# Altium PCB PCB_V2.0.PcbDoc
Units mm, origin at the board's own origin, x right, y up, seen from the top; angles counter-clockwise.
Board outline 72 x 42.16 mm, 2 copper layers (Top Layer, Bottom Layer), stack 1.57 mm thick; 19 components, 30 nets, 54 pads, 18 vias.
Unrouted connection lines stored in the file: 2.
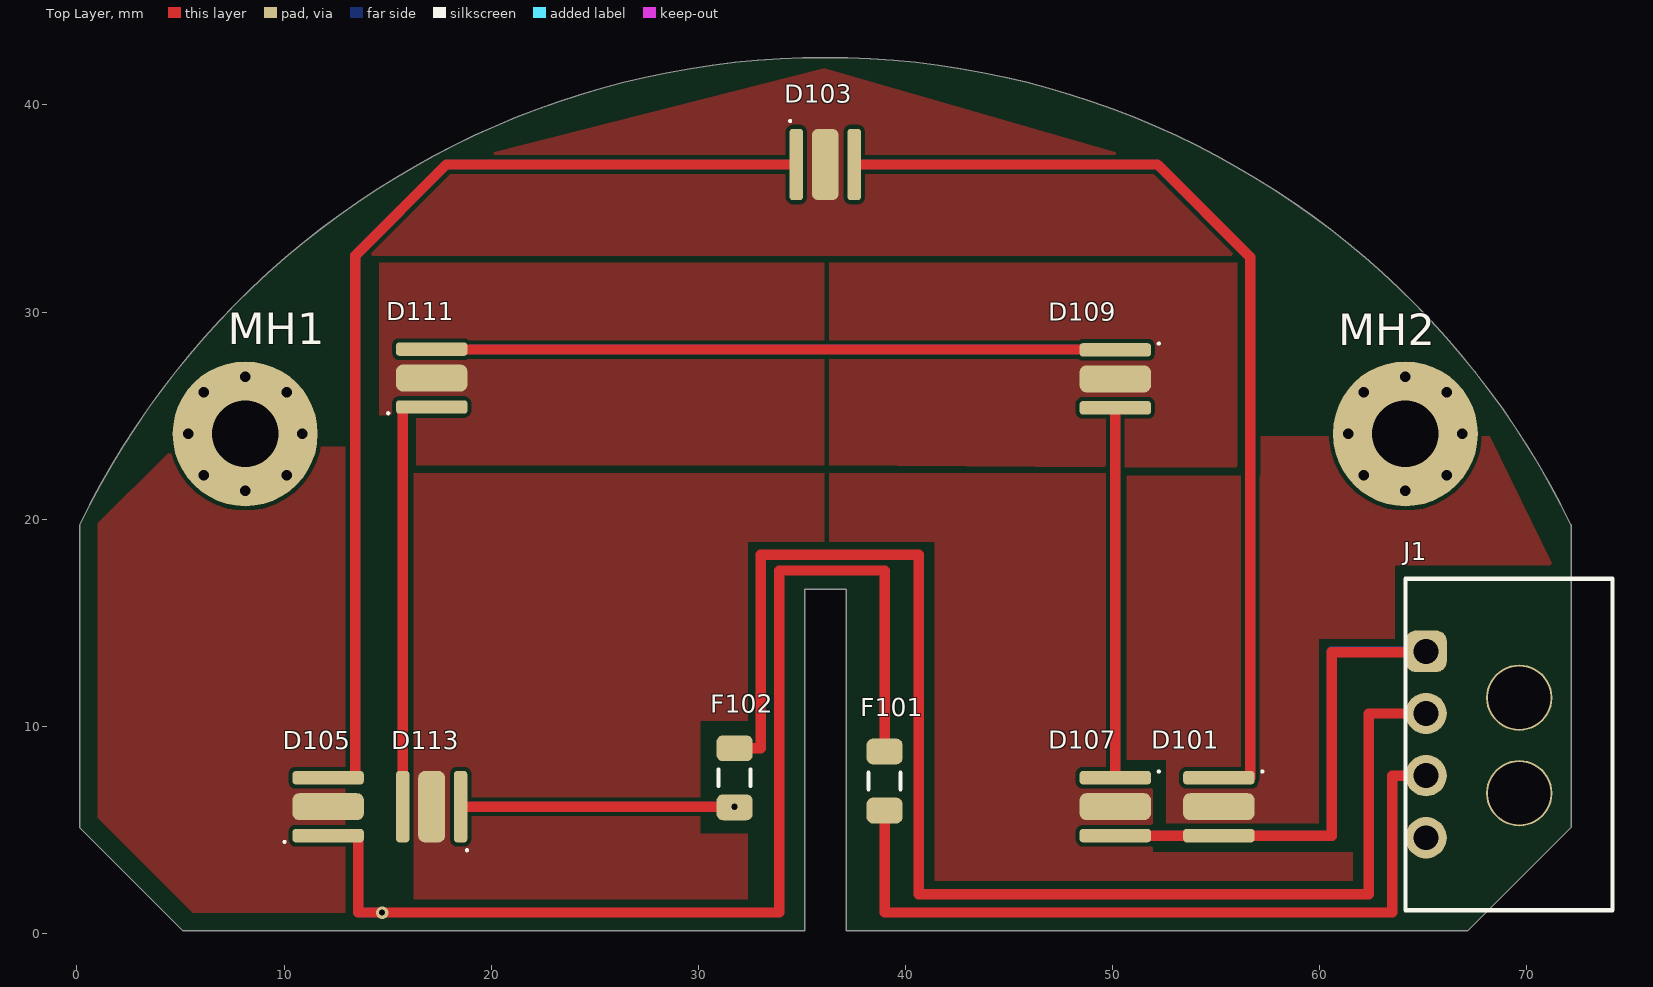
[diagram p0: Top Layer view]
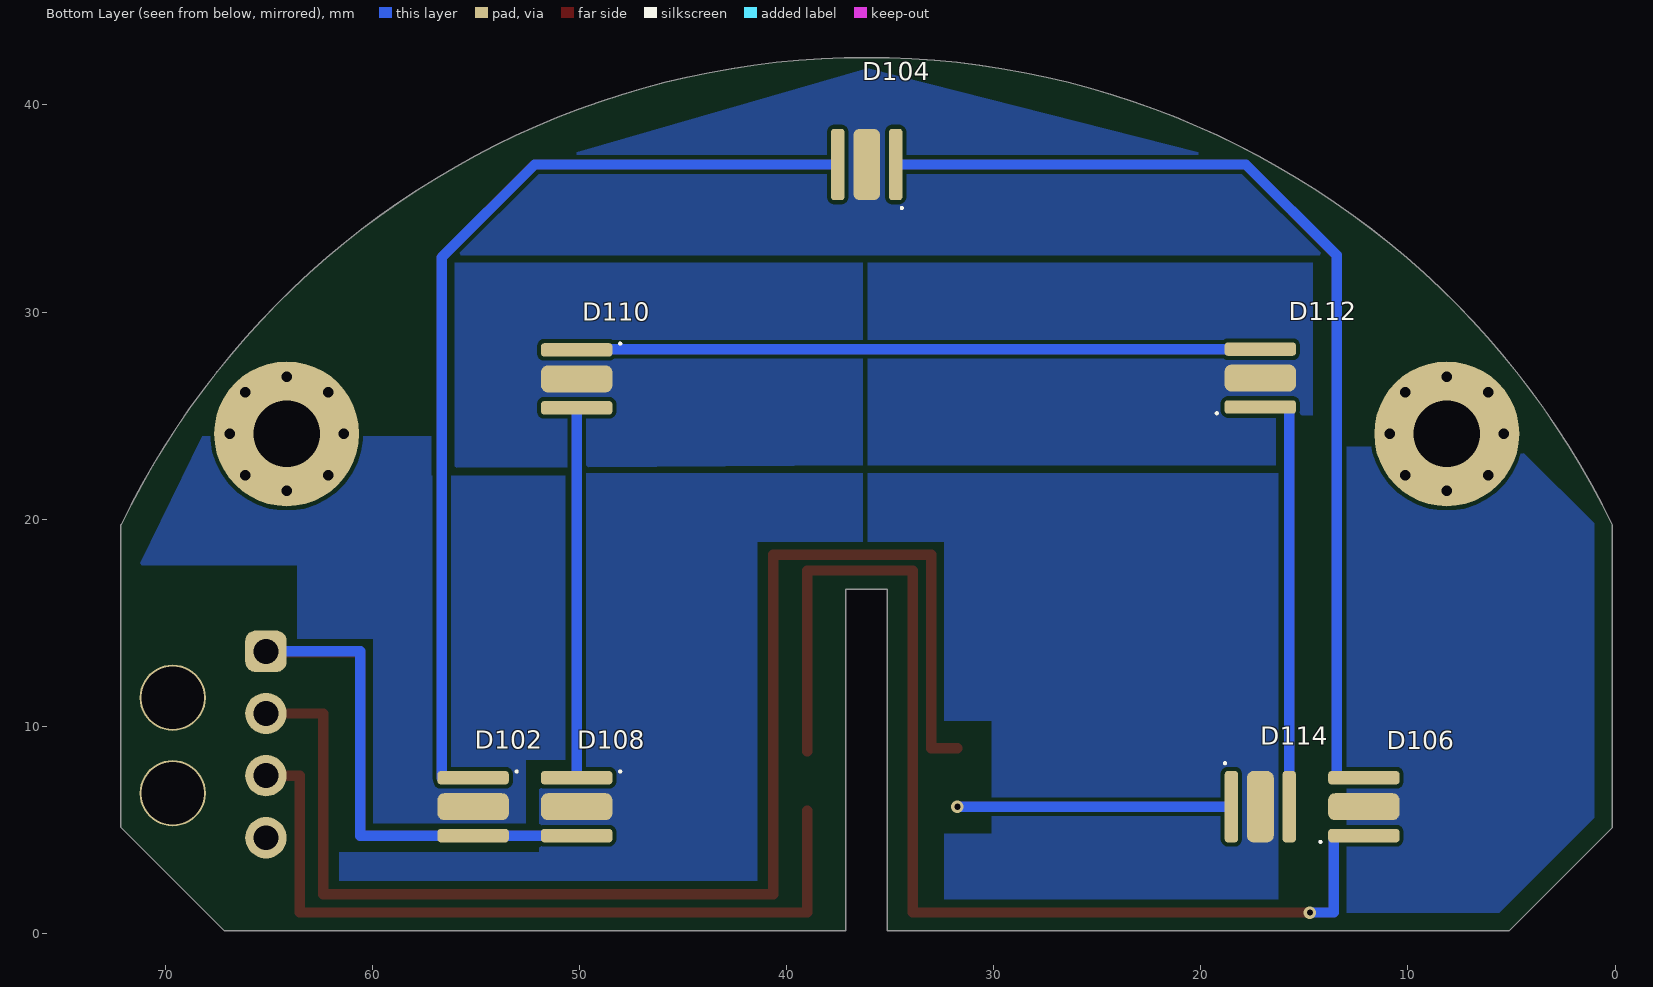
[diagram p1: Bottom Layer view, seen from below]
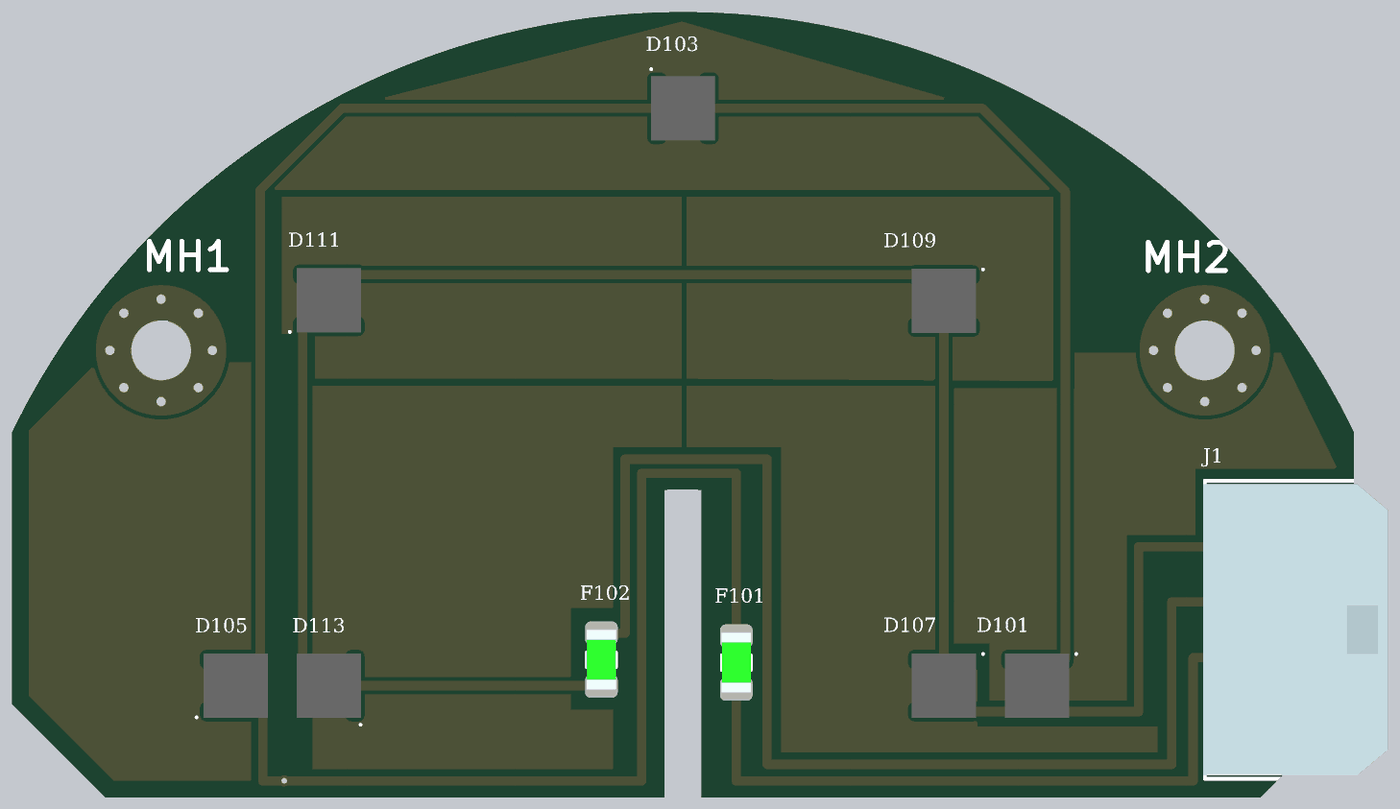
[diagram p2: 3D render of the assembled board from above, using the file's embedded part models]
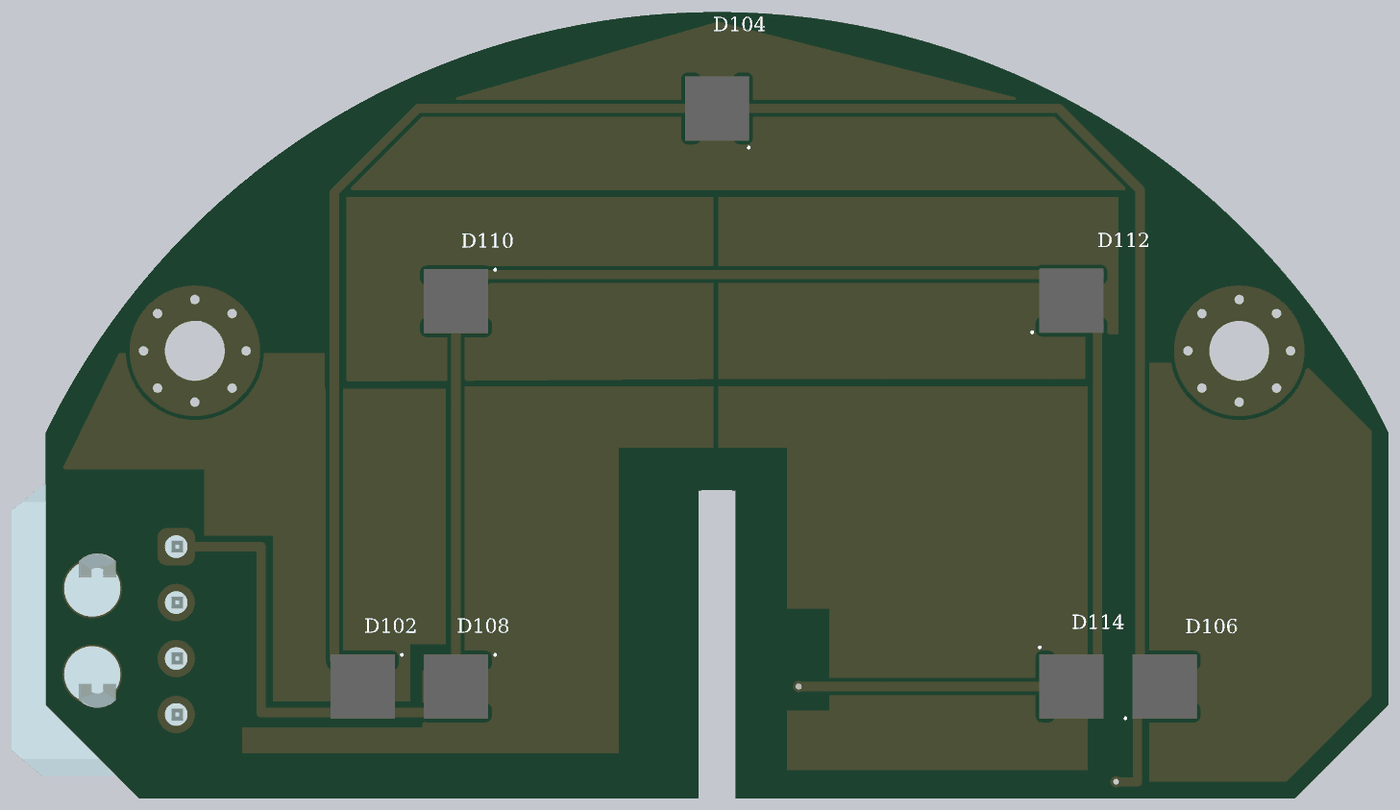
[diagram p3: 3D render of the assembled board from below, using the file's embedded part models]

## Layer stack, top to bottom
Top Solder: solder mask 0.01, Solder Resist, Dk 3.5
Top Layer: signal copper 0.035
Dielectric 1: dielectric 1.5, FR-4, Dk 4.8
Bottom Layer: signal copper 0.035
Bottom Solder: solder mask 0.01, Solder Resist, Dk 3.5

## Board outline
5.127,0.127 0.127,5.127 0.127,19.727 cw(c36.127,2.291) 72.127,19.727 72.127,5.127 67.127,0.127 37.127,0.127 37.127,16.627 35.127,16.627 35.127,0.127

## Design rules (kind name [scope] priority, off if disabled: settings)
Clearance [All] p1: gap=0.2 ignorepadtopadclearanceinfootprint=FALSE
HoleSize [All] p1: absolutevalues=TRUE maxlimit=2.5 minlimit=0.025 maxpercent=80.000 minpercent=20.000
PlaneClearance [All] p1: clearance=0.5
PolygonConnect [All] p1: connectstyle=Direct reliefconductorwidth=0.2 reliefentries=4 polygonreliefangle="45 Angle" airgapwidth=0.2
RoutingCorners [All] p1: cornerstyle=45-Degree minsetback=2 maxsetback=3
RoutingVias [All] p1: holewidth=0.3 width=0.6 viastyle="Through Hole" minholewidth=0.2 minwidth=0.4 maxholewidth=0.7 maxwidth=1.5
SolderMaskExpansion [All] p1: expansion=0.102 istentingtop=TRUE
UnRoutedNet [All] p1: checkbadconnections=TRUE
Width [All] p1: maxlimit=5 minlimit=0.2 preferedwidth=0.5
26 further rules are at their usual default settings.

## Components (designator, comment, footprint, x,y, rotation, side; value= is the part's Value field where it differs from the comment)
D101 "150353GS74500" "LED_3535_WE - duplicate" 55.127,6.127 r270 top
D102 "150353GS74500" "LED_3535_WE - duplicate" 55.127,6.127 r270 bottom
D103 "150353GS74500" "LED_3535_WE - duplicate" 36.127,37.127 r0 top
D104 "150353GS74500" "LED_3535_WE - duplicate" 36.127,37.127 r0 bottom
D105 "150353GS74500" "LED_3535_WE - duplicate" 12.127,6.127 r90 top
D106 "150353GS74500" "LED_3535_WE - duplicate" 12.127,6.127 r90 bottom
D107 "150353RS74500" "LED_3535_WE - duplicate" 50.127,6.128 r270 top
D108 "150353RS74500" "LED_3535_WE - duplicate" 50.127,6.127 r270 bottom
D109 "150353RS74500" "LED_3535_WE - duplicate" 50.127,26.78 r270 top
D110 "150353RS74500" "LED_3535_WE - duplicate" 50.127,26.78 r270 bottom
D111 "150353RS74500" "LED_3535_WE - duplicate" 17.127,26.818 r90 top
D112 "150353RS74500" "LED_3535_WE - duplicate" 17.127,26.818 r90 bottom
D113 "150353RS74500" "LED_3535_WE - duplicate" 17.127,6.127 r180 top
D114 "150353RS74500" "LED_3535_WE - duplicate" 17.127,6.127 r180 bottom
F101 "0437001.WRA" Fuse_1206 38.989,7.366 r90 top
F102 "0437001.WRA" Fuse_1206 31.75,7.521 r270 top
J1 "436500400" J_MicroFit_1x4 69.127,9.127 r90 top
MH1 "Mounting_Hole_M3" Mounting_Hole_M3 8.127,24.127 r0 top
MH2 "Mounting_Hole_M3" Mounting_Hole_M3 64.127,24.127 r0 top

## Footprints (in the part's own frame and the unit in brackets; to place one, negate y for a bottom-side part, rotate by r counter-clockwise, add the part's x,y. Pads: shape width x height; smd on the part's side, far side on the other; paste and mask are expansions set on the pad)
Fuse_1206 [mm] "Chip Resistor, 2-Leads, Body 3,20x1,58mm, IPC Medium Density"
  rrect50% 1.25x1.75 smd: 1(-1.425,0) 2(1.425,0)
  silkscreen extent -0.4,-0.77 0.4,0.77, body extent -1.6,-0.79 1.6,0.79, height 0.86
J_MicroFit_1x4 [mm]
  rrect50% 2x2 hole 1.2: 1(4.5,4)
  round 2 hole 1.2: 2(1.5,4) 3(-1.5,4) 4(-4.5,4)
  round 3.2 hole 3: ""(-2.35,-0.5) ""(2.26,-0.5)
  silkscreen extent -8,-5 8,5, body extent -7.83,-4.82 7.83,5.08, height 6.06
"LED_3535_WE - duplicate" [mm] "DFN, 2-Leads, Body 3,25x3,25mm, Pitch 2,28mm, IPC Medium Density"
  rrect50% 1.3x3.45 smd: 17(0,0)
  rrect50% 0.65x3.45 smd: A(1.397,0) K(-1.397,0)
  silkscreen extent -1.75,2.05 -1.65,2.15, body extent -1.73,-1.73 1.73,1.73, height 2.1
Mounting_Hole_M3 [mm]
  round 7 hole 3.2: 1(0,0)

## Part data
D101 D102 D103 D104 D105 D106: library part LEDGS-3535-85_DUPLICATE, "High Brightness LED, WL-SMDC Series, 525 nm, Green, 85 lm, 350 mA", Case/Package=SMD/SMT, Color=Green, Forward Current=1A, Forward Voltage=3.4V, Manufacturer="Wurth Electronics", Supplier Part Number 1=732-10350-1-ND, Test Current=350mA, Test Temperature=25°C, Thermal Resistance of Package=8°C/W, .Creator=GP, ComponentLink1Description=http://www.farnell.com/datasheets/1886832.pdf?src-supplier=Farnell, ComponentLink1URL=http://www.farnell.com/datasheets/1886832.pdf?src-supplier=Farnell, ComponentLink2Description=http://www.farnell.com/datasheets/1886832.pdf?src-supplier=Element14, ComponentLink2URL=http://www.farnell.com/datasheets/1886832.pdf?src-supplier=Element14, ComponentLink3Description="Where buy it", ComponentLink3URL=https://www.we-online.com/catalog/en/WL-SMDC?sq=150353rs74500&sp=https%3A%2F%2Fwww.we-online.com%2Fweb%2Fen%2Fwuerth_elektronik%2Fsearchpage.php%3Fsearch%3D150353rs74500#150353GS74500, Luminous Flux=85lm, Manufacturer Part Number=150353GS74500, Max Current Rating=1A, Mount="Surface Mount", Packaging="Cut Tape", Pricing 1="1=3,24000, 50=2,85700, 100=2,34700, 500=2,08000 (USD)", REACH SVHC=Unknown, RoHS=Yes, RoHS Compliant=Yes, Supplier 1=Digi-Key, Viewing Angle=125°, Wavelength=525nm
D107 D108 D109 D110 D111 D112 D113 D114: library part LEDRS-3535-55_DUPLICATE, "High Brightness Led, Wl-Smdc Series, 625 Nm, Red, 55 Lm, 350 Ma", Case/Package=SMD/SMT, Color=Red, Forward Current=700mA, Forward Voltage=2.2V, Manufacturer="Wurth Electronics", Supplier Part Number 1=9008911, Test Current=350mA, Test Temperature=25°C, Thermal Resistance of Package=10°C/W, .Creator=GP, ComponentLink1Description=http://www.farnell.com/datasheets/1886833.pdf?src-supplier=Farnell, ComponentLink1URL=http://www.farnell.com/datasheets/1886833.pdf?src-supplier=Farnell, ComponentLink2Description=http://www.farnell.com/datasheets/1886833.pdf?src-supplier=Element14, ComponentLink2URL=http://www.farnell.com/datasheets/1886833.pdf?src-supplier=Element14, ComponentLink3Description="Where buy it", ComponentLink3URL=https://www.we-online.com/catalog/en/WL-SMDC?sq=150353rs74500&sp=https%3A%2F%2Fwww.we-online.com%2Fweb%2Fen%2Fwuerth_elektronik%2Fsearchpage.php%3Fsearch%3D150353rs74500#150353RS74500, Luminous Flux=55lm, Manufacturer Part Number=150353RS74500, Max Current Rating=700mA, Mount="Surface Mount", Packaging="Cut Tape", Pricing 1="5=1,40500 (USD)", REACH SVHC=Unknown, RoHS=Yes, RoHS Compliant=Yes, Stock 1=1, Supplier 1=RSComponents, Viewing Angle=125°, Wavelength=625nm
F101 F102: library part Fuse_1A_63V_1206, "Fuse Chip Fast Acting 1A 63V SMD Solder Pad 1206 Ceramic T/R Automotive", Case Code (Imperial)=1206, Case Code (Metric)=3216, Current Rating=1A, Manufacturer=Littelfuse, Max Operating Temperature=150°C, Min Operating Temperature=-55°C, Supplier Part Number 1=F10001CT-ND, Voltage Rating (AC)=63V, .Creator=DO, Approvals=CSA,cURus, Case/Package=1206, Category=Fuses, ComponentLink1Description=https://www.littelfuse.com/~/media/electronics/datasheets/fuses/littelfuse_fuse_437a_datasheet.pdf.pdf?src-supplier=Digi-Key, ComponentLink1URL=https://www.littelfuse.com/~/media/electronics/datasheets/fuses/littelfuse_fuse_437a_datasheet.pdf.pdf?src-supplier=Digi-Key, ComponentLink2Description="Where buy it", ComponentLink2URL=https://www.mouser.es/ProductDetail/Littelfuse/0437001WRA?qs=DXv0QSHKF4z9CJhPXjxR%252BA%3D%3D, Fuse Type="Board Mount (Cartridge Style Excluded)", Manufacturer Part Number=0437001.WRA, Mount="Surface Mount", Packaging="Tape and Reel", Pricing 1="1=1,52000, 5=1,47000, 10=1,37600, 50=1,13860, 100=0,94880, 250=0,92508, 500=0,78276, 1000=0,68788 (USD)", RoHS=Yes, Stock 1=5820, Supplier 1=Digi-Key, Voltage Rating (DC)=63V
J1: library part J_MicroFit_1x4, "Connector Wire to Board Header 4 Position 3mm Solder Right Angle Thru-Hole Tray", Color=Black, Contact Resistance=10mR, Current Rating=5A, Flammability Rating="UL94 V-0", Manufacturer 1=Molex, Manufacturer Part Number 1=43650-0400, Max Operating Temperature=105°C, Max Voltage Rating (AC)=600V, Min Operating Temperature=-40°C, Package Quantity=2380, Supplier Part Number 1=1012232, Voltage Rating (DC)=250V, Category="Headers and Wire Housings", ComponentLink1Description=https://datasheet.ciiva.com/19462/884184-19462234.pdf?src-supplier=Jameco, ComponentLink1URL=https://datasheet.ciiva.com/19462/884184-19462234.pdf?src-supplier=Jameco, ComponentLink2Description=https://datasheet.ciiva.com/5151/0436500400-pcb-headers-148663-5151881.pdf?src-supplier=Mouser, ComponentLink2URL=https://datasheet.ciiva.com/5151/0436500400-pcb-headers-148663-5151881.pdf?src-supplier=Mouser, ComponentLink3Description=https://datasheet.ciiva.com/16085/0436500400-pcb-headers-16085752.pdf?src-supplier=Onlinecomponents.com, ComponentLink3URL=https://datasheet.ciiva.com/16085/0436500400-pcb-headers-16085752.pdf?src-supplier=Onlinecomponents.com, ComponentLink4Description=https://datasheet.ciiva.com/11748/0900766b80d6135b-11748178.pdf?src-supplier=RSComponents, ComponentLink4URL=https://datasheet.ciiva.com/11748/0900766b80d6135b-11748178.pdf?src-supplier=RSComponents, ComponentLink5Description=https://datasheet.ciiva.com/30221/142510436500400-pcb-headers-30221164.pdf?src-supplier=Onlinecomponents.com, ComponentLink5URL=https://datasheet.ciiva.com/30221/142510436500400-pcb-headers-30221164.pdf?src-supplier=Onlinecomponents.com, ComponentLink6Description=https://datasheet.ciiva.com/17080/70266896-17080471.pdf?src-supplier=Allied+Electronics, ComponentLink6URL=https://datasheet.ciiva.com/17080/70266896-17080471.pdf?src-supplier=Allied+Electronics, ComponentLink7Description=https://datasheet.ciiva.com/7094/1946229-7094763.pdf?src-supplier=Newark, ComponentLink7URL=https://datasheet.ciiva.com/7094/1946229-7094763.pdf?src-supplier=Newark, ComponentLink8Description=https://datasheet.ciiva.com/9449/0436500400-pcb-headers-9449446.pdf?src-supplier=Avnet, ComponentLink8URL=https://datasheet.ciiva.com/9449/0436500400-pcb-headers-9449446.pdf?src-supplier=Avnet, Connector Type=Plug, Contact Material="Brass,Copper Alloy", Contact Plating=Tin, Depth=3.6mm, Gender=Male, Glow Wire Compliant=Compliant, Halogen Free="Low Halogen", Height=4.5mm, Housing Color=Black, Housing Material=Thermoplastic, Lead Free="Contains Lead", Length=14.86mm, Mount="Through Hole,Cable", Number of Circuits=4, Number of Contacts=4, Number of Positions=4, Number of Rows=1, Orientation="Right Angle", Packaging=Tray, Pitch=3mm, Pricing 1="1=1,24000, 10=1,22000, 50=1,19000, 100=1,17000, 500=1,14000, 1000=1,12000 (EUR)", Radiation Hardening=No, RoHS=Yes, RoHS Compliant=Yes, Series=43650, Stock 1=4623, Supplier 1=Farnell, Termination=Solder, Voltage Rating=600V

## Via types
v1: diameter 0.7, hole 0.5, Top Layer to Bottom Layer, tented both sides, 16 vias
v2: diameter 0.6, hole 0.3, Top Layer to Bottom Layer, tented both sides, 2 vias

## Nets (pads, with @x,y where several pads share a name; then routed paths per layer and width w, separated by ;. In a path a pad name is that pad's centre, name@x,y a point inside that pad or via, vN(x,y) a via of type N, cw(c..) or ccw(c..) an arc to the next point about the centre after c; other vN are vias at no path point)
GND: J1.4 MH1.1 MH2.1
  other v1: 8.127,21.377 64.127,21.377 6.127,22.127 10.127,22.127 62.127,22.127 66.127,22.127 5.377,24.127 10.877,24.127 61.377,24.127 66.877,24.127 6.127,26.127 10.127,26.127 62.127,26.127 66.127,26.127 8.127,26.877 64.127,26.877
"Green LEDs": F101.1 J1.3 | length 37.7
  Top Layer w0.5: F101.1 38.989,1.016 63.5,1.016 63.5,7.627 J1.3
NetD101_K: D101.K D103.A | length 47.6
  Top Layer w0.5: D103.A 52.166,37.127 56.642,32.651 56.642,7.524 D101.K
NetD102_K: D102.K D104.A | length 47.6
  Bottom Layer w0.5: D104.A 52.154,37.127 56.642,32.639 56.642,7.524 D102.K
NetD103_K: D103.K D105.A | length 49.6
  Top Layer w0.5: D105.A 13.364,7.524 13.44,7.599 13.44,32.726 17.84,37.127 D103.K
NetD104_K: D104.K D106.A | length 49.6
  Bottom Layer w0.5: D106.A 13.364,7.524 13.44,7.599 13.44,32.744 17.823,37.127 D104.K
NetD105_K: D105.K D106.K F101.2 | length 62.1
  Top Layer w0.5: D105.K 13.589,4.73 13.589,1.016 v2(14.732,1.016) 33.909,1.016 33.909,17.526 38.989,17.526 F101.2
  Bottom Layer w0.5: D106.K 13.589,4.73 13.589,1.016 v2(14.732,1.016)
NetD107_K: D107.K D109.A | length 17.9
  Top Layer w0.5: D107.K D109.A
NetD108_K: D108.K D110.A | length 17.9
  Bottom Layer w0.5: D108.K D110.A
NetD109_K: D109.K D111.A | length 33
  Top Layer w0.5: D111.A 17.146,28.196 50.108,28.196 D109.K
NetD110_K: D110.K D112.A | length 33
  Bottom Layer w0.5: D112.A 50.127,28.215 D110.K
NetD111_K: D111.K D113.A | length 20.7
  Top Layer w0.5: D113.A 15.73,25.421 D111.K
NetD112_K: D112.K D114.A | length 20.7
  Bottom Layer w0.5: D114.A 15.73,25.421 D112.K
NetD113_K: D113.K D114.K F102.2 | length 26.5
  Top Layer w0.5: D113.K v2(31.75,6.127)
  Bottom Layer w0.5: D114.K v2(31.75,6.127)
"Red LEDs": F102.1 J1.2 | length 67.8
  Top Layer w0.5: F102.1 33.02,8.946 33.02,18.288 40.64,18.288 40.64,1.905 62.357,1.905 62.357,10.627 J1.2
T1: D101.17
T2: D102.17
T3: D103.17
T4: D104.17
T5: D105.17
T6: D106.17
T7: D107.17
T8: D108.17
T9: D109.17
T10: D110.17
T11: D111.17
T12: D112.17
T13: D113.17
T14: D114.17
VCC: D101.A D102.A D107.A D108.A J1.1 | length 47.8
  Top Layer w0.5: D107.A 50.127,4.73 D101.A 60.579,4.73 60.579,13.589 65.127,13.589 J1.1
  Bottom Layer w0.5: D108.A D102.A 60.579,4.73 60.579,13.627 J1.1
pads on no net: J1.

## Polygon pours and split planes (outlines as drawn)
T13 on Top Layer "T13_L01_P018" (solid, pour order 18): 16.256,22.225 36.068,22.225 36.068,18.923 32.385,18.923 32.385,10.287 30.099,10.287 30.099,4.826 32.385,4.826 32.385,1.651 16.256,1.651
T7 on Top Layer "T7_L01_P017" (solid, pour order 17): 51.943,8.001 51.943,3.937 61.595,3.937 61.595,2.54 41.402,2.54 41.402,18.923 36.322,18.923 36.322,22.225 49.784,22.225 49.784,8.001
T5 on Top Layer "T5_L01_P009" (solid, pour order 9): 12.954,1.016 5.588,1.016 1.016,5.588 1.016,19.812 4.699,23.495 12.954,23.495
T3 on Top Layer "T3_L01_P007" (solid, pour order 7): 56.567,32.726 13.44,32.726 17.84,37.127 36.068,41.783 52.166,37.127
T11 on Top Layer "T11_L01_P004" (solid, pour order 4): 36.068,22.606 36.068,32.385 14.605,32.385 14.605,25.019 16.383,25.019 16.383,22.606
T9 on Top Layer "T9_L01_P003" (solid, pour order 3): 36.322,22.604 56.007,22.479 56.007,32.385 36.322,32.385
T1 on Top Layer "T1_L01_P002" (solid, pour order 2): 50.673,8.382 52.578,8.382 52.578,5.334 59.944,5.334 59.944,14.224 63.627,14.224 63.627,17.78 71.247,17.78 68.199,24.003 57.147,24.003 57.147,22.098 50.673,22.098
T8 on Bottom Layer "T8_L02_P020" (solid, pour order 20): 36.322,18.923 36.322,22.225 49.657,22.225 49.657,8.001 51.943,8.001 51.943,3.937 61.595,3.937 61.595,2.54 41.402,2.54 41.402,18.923
T14 on Bottom Layer "T14_L02_P019" (solid, pour order 19): 16.256,1.651 32.385,1.651 32.385,4.826 30.099,4.826 30.099,10.287 32.385,10.287 32.385,18.923 36.068,18.923 36.068,22.225 16.256,22.225
T4 on Bottom Layer "T4_L02_P016" (solid, pour order 16): 36.068,41.783 52.154,37.127 56.537,32.744 13.44,32.744 17.823,37.127
T12 on Bottom Layer "T12_L02_P015" (solid, pour order 15): 36.068,32.385 36.068,22.606 16.383,22.606 16.383,25.019 14.605,25.019 14.605,32.385
T10 on Bottom Layer "T10_L02_P014" (solid, pour order 14): 36.322,22.606 36.322,32.385 56.007,32.385 56.007,22.479
T6 on Bottom Layer "T6_L02_P013" (solid, pour order 13): 12.954,23.495 12.954,1.016 5.588,1.016 1.016,5.588 1.016,19.812 4.699,23.495
T2 on Bottom Layer "T2_L02_P010" (solid, pour order 10): 52.578,5.334 59.944,5.334 59.944,14.224 63.627,14.224 63.627,17.78 71.247,17.78 68.199,24.003 57.15,24.003 57.15,22.098 50.673,22.098 50.673,8.382 52.578,8.382

## Silkscreen, mask and mechanical layers (free items; w line width, h text height)
Mechanical 1:
  the board outline again, w0.254